# Altium PCB Charging.PcbDoc
Units mm, origin at the board's own origin, x right, y up, seen from the top; angles counter-clockwise.
Board outline 92.58 x 84.07 mm, 2 copper layers (Top Layer, Bottom Layer); 22 components, 22 nets, 84 pads, 0 vias.
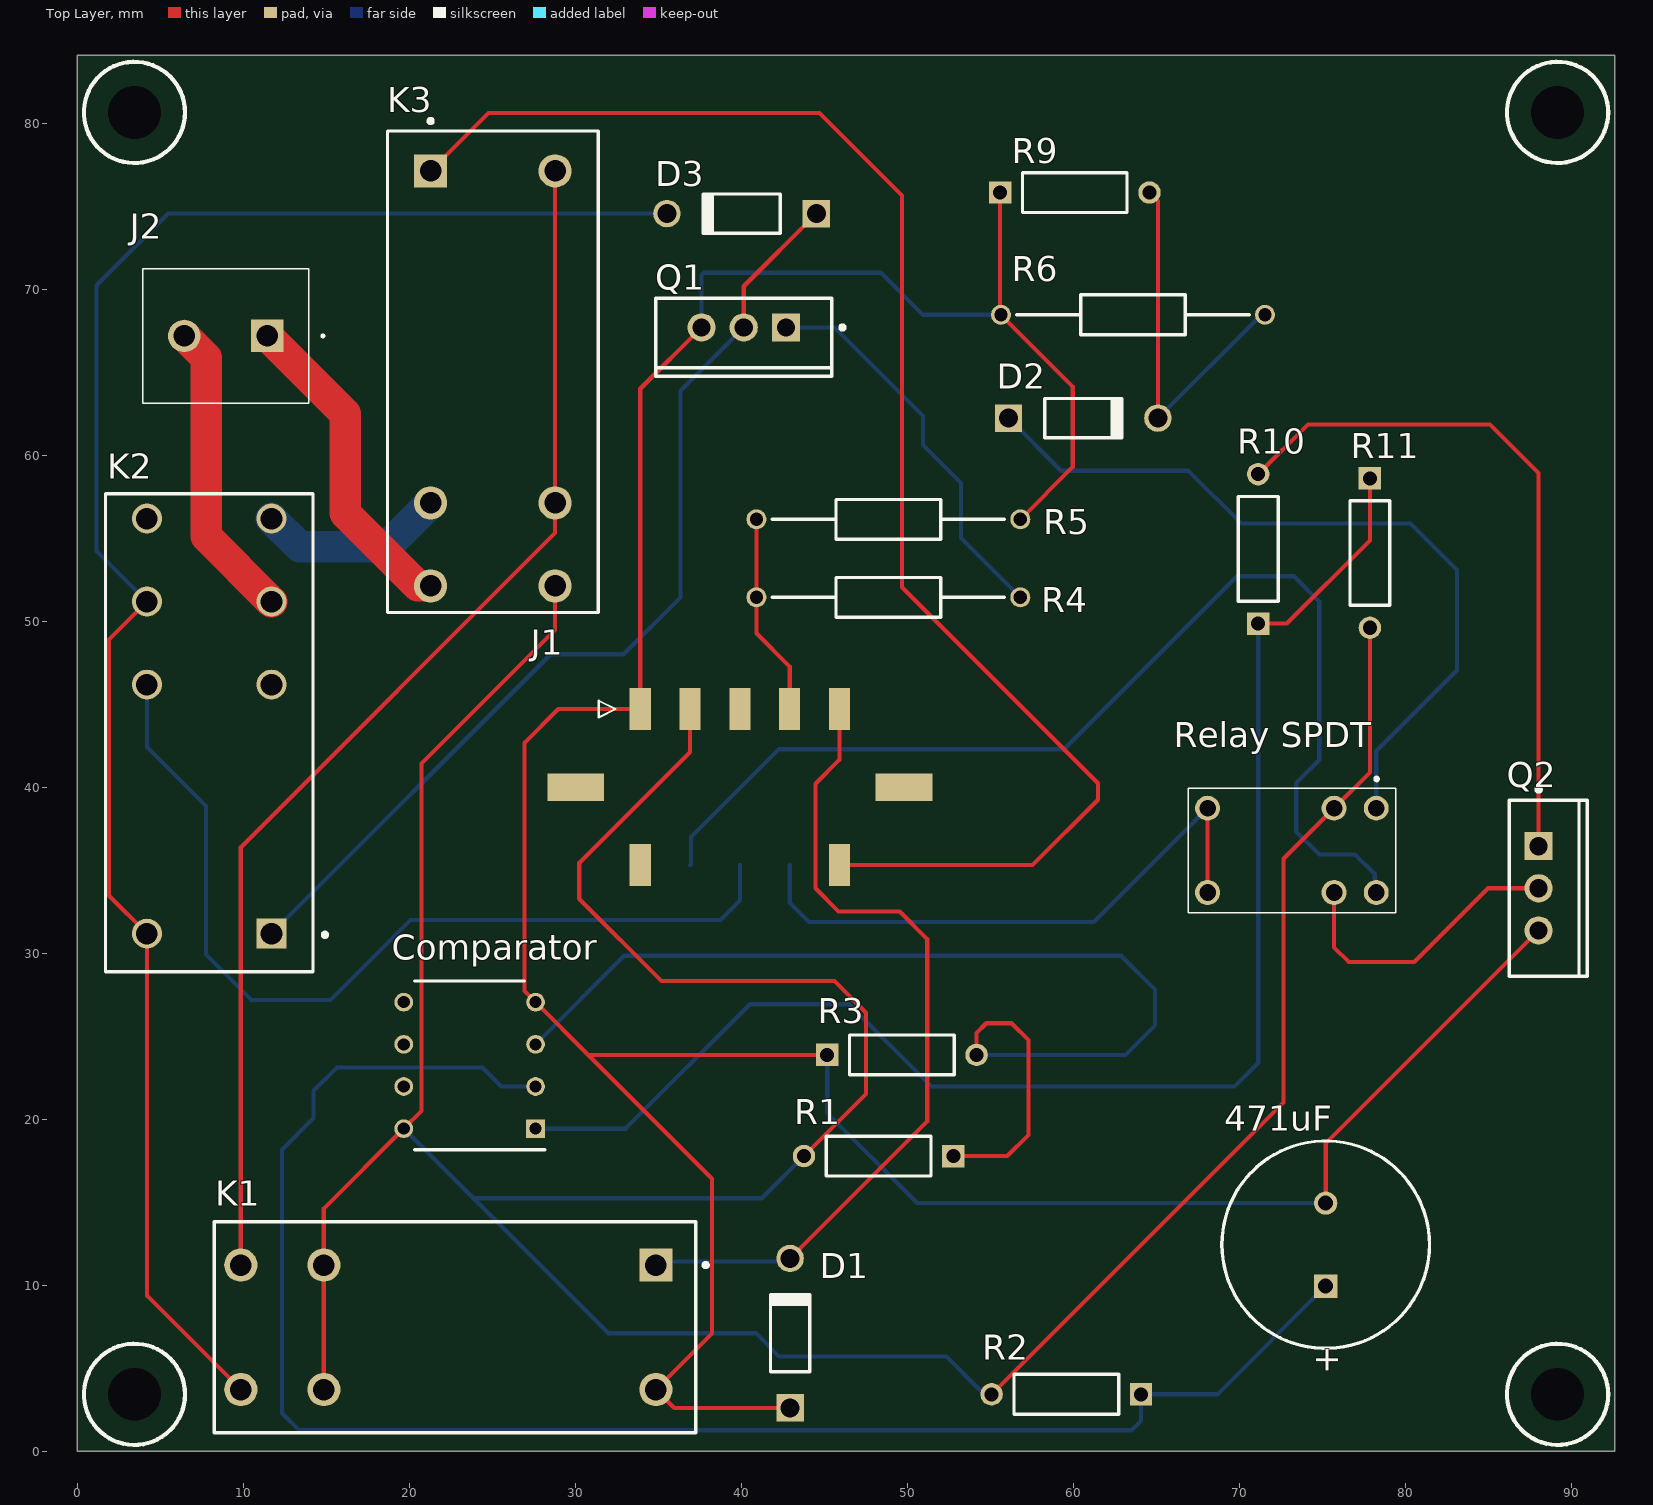
[diagram p0: Top Layer view]
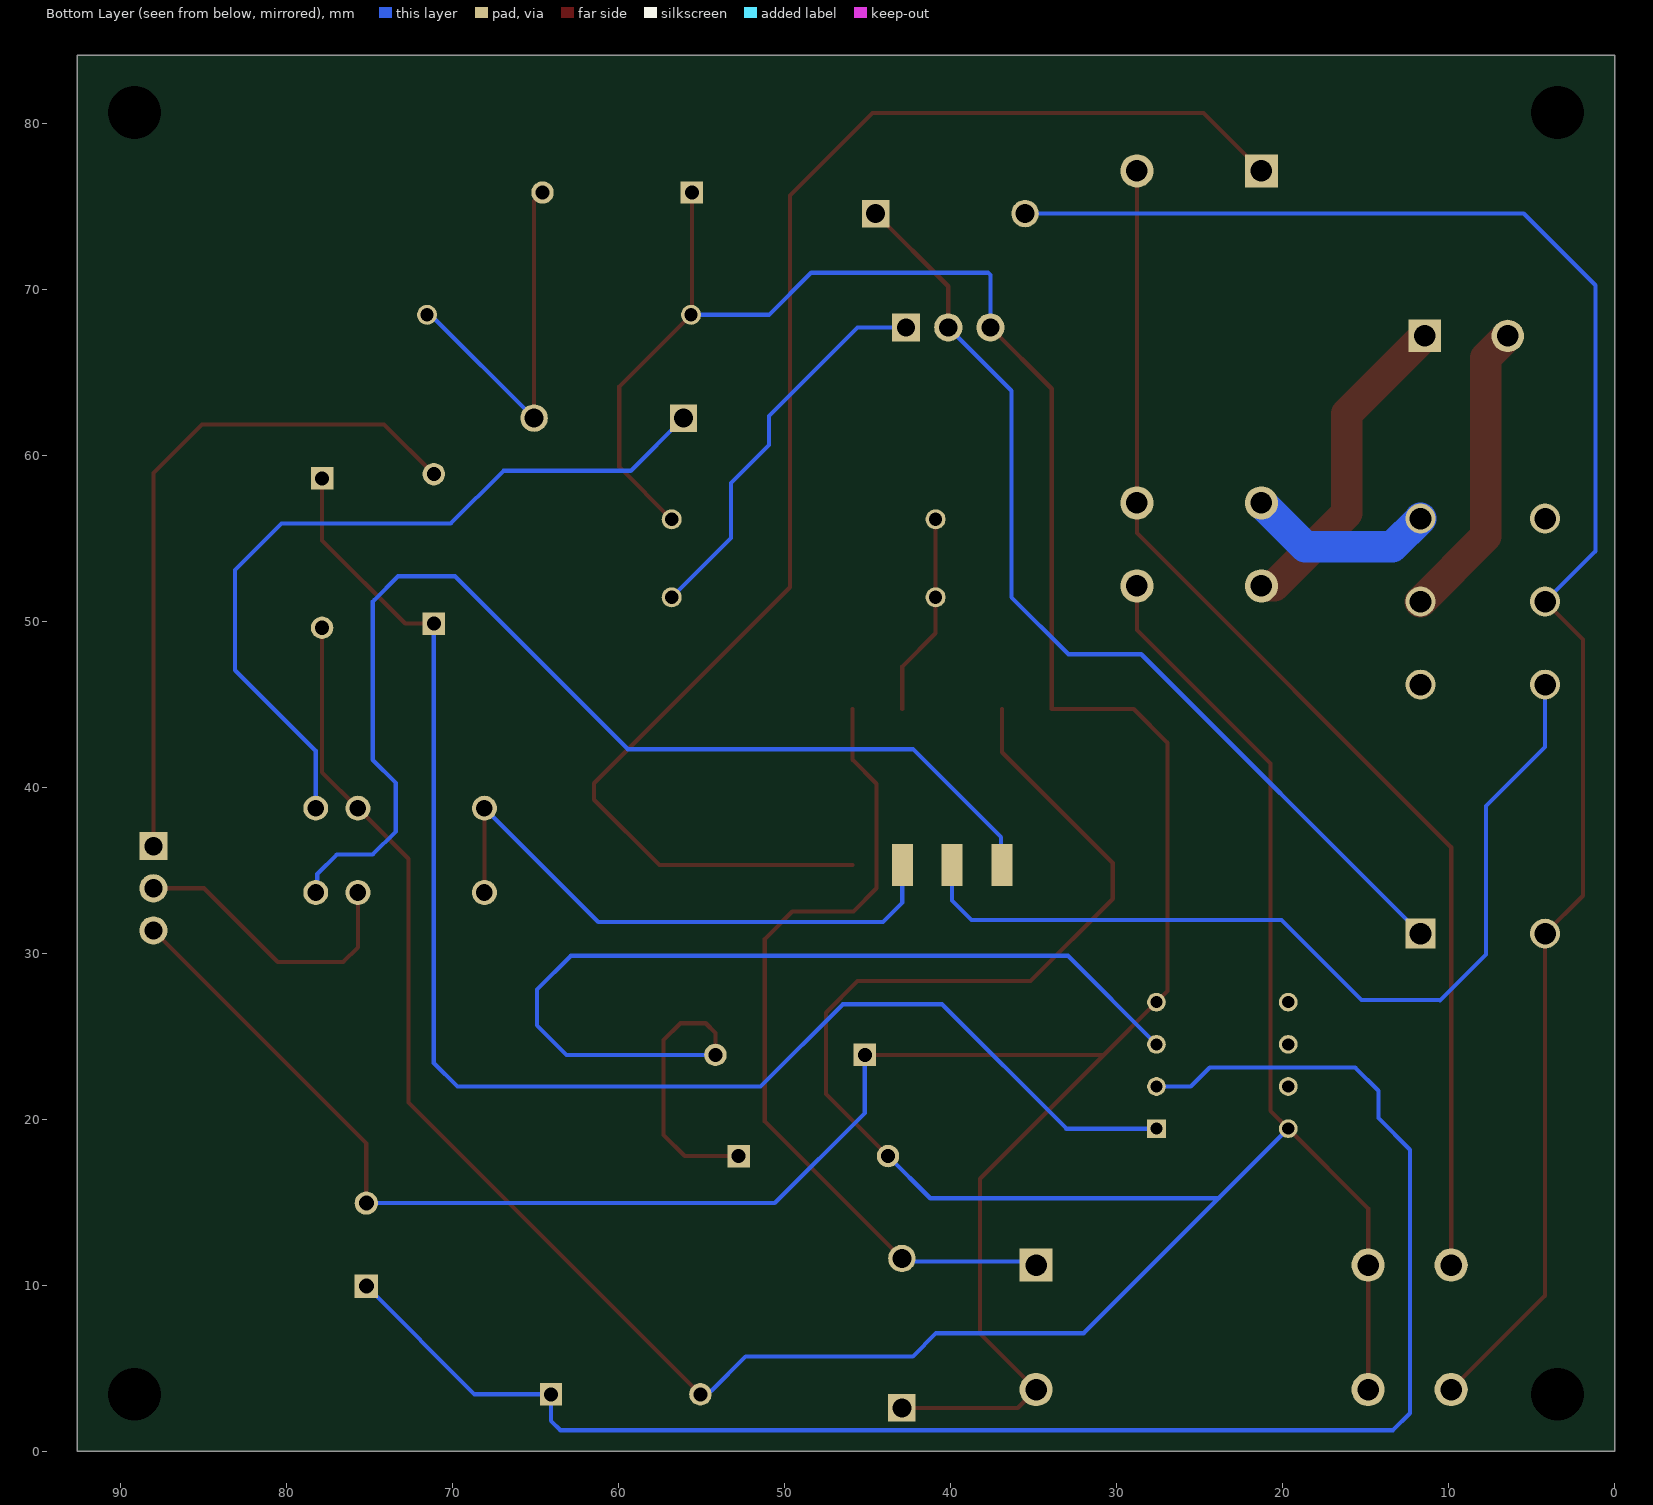
[diagram p1: Bottom Layer view, seen from below]

## Layer stack, top to bottom
Top Solder: solder mask 0.0102, Solder Resist, Dk 3.5
Top Layer: signal copper 0.0356
Dielectric 1: dielectric 0.32, FR-4, Dk 4.8
Bottom Layer: signal copper 0.0356
Bottom Solder: solder mask 0.0102, Solder Resist, Dk 3.5

## Board outline
0,0 0,84.074 92.583,84.074 92.583,0

## Design rules (kind name [scope] priority, off if disabled: settings)
Clearance [All] p1: gap=0.254 ignorepadtopadclearanceinfootprint=FALSE
PolygonConnect [All] p1: connectstyle=Relief reliefconductorwidth=0.254 reliefentries=4 polygonreliefangle="90 Angle" airgapwidth=0.254
RoutingVias [All] p1: holewidth=0.711 width=1.27 viastyle="Through Hole" minholewidth=0.711 minwidth=1.27 maxholewidth=0.711 maxwidth=1.27
SolderMaskExpansion [All] p1: expansion=0.102 istentingtop=FALSE
SupplyNets "Schematic Supply Nets_12" [InNet('COIL_2')] p1: voltage=0.000
SupplyNets "Schematic Supply Nets_11" [InNet('CP (Control Pilot)')] p2: voltage=0.000
SupplyNets "Schematic Supply Nets_10" [InNet('1IN-')] p3: voltage=0.000
SupplyNets "Schematic Supply Nets_9" [InNet('SDC-')] p4: voltage=0.000
SupplyNets "Schematic Supply Nets_8" [InNet('BMS Fault')] p5: voltage=0.000
SupplyNets "Schematic Supply Nets_7" [InNet('PE (GND)')] p6: voltage=0.000
SupplyNets "Schematic Supply Nets_6" [InNet('Switch Out')] p7: voltage=0.000
SupplyNets "Schematic Supply Nets_5" [InNet('Jumpstart')] p8: voltage=0.000
SupplyNets "Schematic Supply Nets_4" [InNet('BMS CP Control')] p9: voltage=0.000
SupplyNets "Schematic Supply Nets_3" [InNet('IMD LED')] p10: voltage=0.000
SupplyNets "Schematic Supply Nets_2" [InNet('12V')] p11: voltage=0.000
SupplyNets "Schematic Supply Nets_1" [InNet('IMD Fault')] p12: voltage=0.000
SupplyNets "Schematic Supply Nets" [InNet('SDC+')] p13: voltage=0.000
Width [All] p1: maxlimit=0.254 minlimit=0.254 preferedwidth=0.254
30 further rules are at their usual default settings.

## Components (designator, comment, footprint, x,y, rotation, side; value= is the part's Value field where it differs from the comment)
471uF "ECA-1JHG471" CAPPR65-500-2000X1250X2200 75.184,12.446 r90 top
Comparator "LM2903P" DIP794W53P254L959H508Q8N 23.622,23.241 r180 top
D1 "1N4001-T" DIOD-DO-41-P-2_V 42.926,7.112 r90 top
D2 "1N4001-T" DIOD-DO-41-P-2_V 60.579,62.23 r0 top
D3 "1N4001-T" DIOD-DO-41-P-2_V 40.005,74.549 r180 top
J1 "43045-1019" 43045-10YY_181920 39.899,40.005 r180 top
J2 "1729018" 1729018 11.43,67.183 r180 top
K1 "G2RL-2A4-DC12" FP-G2RL-2A4-DC12-MFG 22.74,7.465 r180 top
K2 "G2RL-24-DC24" OMRON-G2RL-24_V 7.934,43.681 r90 top
K3 "G2RL-2A4-DC12" FP-G2RL-2A4-DC12-MFG 25.019,65.024 r270 top
Q1 "IRF540" VISH-TO-220AB-3_A 40.132,67.691 r270 top
Q2 "IRF540" VISH-TO-220AB-3_A 88.011,33.909 r0 top
R1 "MFR-25FBF52-1K" RESA60-630X240 48.26,17.78 r180 top
R2 "MFR-25FBF52-1K" RESA60-630X240 59.563,3.429 r180 top
R3 "MFR-25FBF52-1K" RESA60-630X240 49.657,23.876 r0 top
R4 "MFR-25FBF52-2K" RESAD1590W60L630D240 40.894,51.435 r0 top
R5 "MFR-25FBF52-2K" RESAD1590W60L630D240 40.894,56.134 r0 top
R6 "2.7k" RESAD1590W60L630D240 55.626,68.453 r0 top
R9 "MFR-25FBF52-1K" RESA60-630X240 60.071,75.819 r0 top
R10 "4.75 k" RESA60-630X240 71.12,54.356 r90 top
R11 "4.75 k" RESA60-630X240 77.851,54.102 r270 top
"Relay SPDT" "G5V-1-DC12" G5V1DC12 73.152,36.52 r180 top

## Footprints (in the part's own frame and the unit in brackets; to place one, negate y for a bottom-side part, rotate by r counter-clockwise, add the part's x,y. Pads: shape width x height; smd on the part's side, far side on the other; paste and mask are expansions set on the pad)
43045-10YY_181920 [mm]
  rect 1.27x2.54 smd: 1(6,-4.7) 2(3,-4.7) 3(0,-4.7) 4(-3,-4.7) 5(-6,-4.7) 6(6,4.7) 10(-6,4.7)
  rect 1.27x2.54 smd far side: 7(3,4.7) 8(0,4.7) 9(-3,4.7)
  rect 3.43x1.65 smd: 11(9.885,0) 12(-9.885,0)
  silkscreen extent 7.5,-5.2 8.5,-4.2, body extent -11.32,-5.6 11.32,5.6, height 9.96
1729018 [mm]
  rect 1.95x1.95 hole 1.3: 1(0,0)
  round 1.95 hole 1.3: 2(5,0)
  silkscreen extent -3.4,-4.05 7.5,4.05, body extent -2.93,-4.05 7.47,4.05, height 10.82
CAPPR65-500-2000X1250X2200 [mm] "THD, 2-Leads, Dia 12.5mm, Body Length 20mm"
  rect 1.4x1.4 hole 0.9: 1(-2.5,0)
  round 1.4 hole 0.9: 2(2.5,0)
  silkscreen extent -6.25,-6.25 6.25,6.25, body extent -6.25,-6.25 6.26,6.25, height 22.01
DIOD-DO-41-P-2_V [mm] "2-Leads, Axial Lead, Body 4.635x2.36mm, Pin Spacing 9mm"
  rect 1.65x1.65 hole 1.15: 1(-4.5,0)
  round 1.65 hole 1.15: 2(4.5,0)
  silkscreen extent -2.32,-1.18 2.32,1.18, body extent -4.93,-1.18 4.93,1.18, height 2.35
DIP794W53P254L959H508Q8N [mm]
  rect 1.13x1.13 hole 0.73: 1(-3.97,3.81)
  round 1.13 hole 0.73: 2(-3.97,1.27) 3(-3.97,-1.27) 4(-3.97,-3.81) 5(3.97,-3.81) 6(3.97,-1.27) 7(3.97,1.27) 8(3.97,3.81)
  silkscreen extent -4.54,-5.08 3.3,5.08, body extent -4.1,-4.64 4.1,4.64, height 4.21
FP-G2RL-2A4-DC12-MFG [mm]
  rect 2x2 hole 1.3 paste-2539.97 mask+0: 1(-12.1,-3.75)
  round 2 hole 1.3 paste-2539.97 mask+0: 3(7.9,-3.75) 4(12.9,-3.75) 5(12.9,3.75) 6(7.9,3.75) 8(-12.1,3.75)
  silkscreen extent -15.23,-6.35 14.5,6.35, body extent -14.6,-6.45 14.6,6.45, height 0.25
G5V1DC12 [mm]
  round 1.5 hole 1: 1(-5.08,-2.215) 2(-2.54,-2.215) 5(5.08,-2.215) 6(5.08,2.865) 9(-2.54,2.865) 10(-5.08,2.865)
  silkscreen extent -6.25,-4.07 6.25,4.08, body extent -6.15,-3.3 6.15,3.98, height 9.8
OMRON-G2RL-24_V [mm] "THD, 8-Leads, Body 28.8x12.5mm"
  rect 1.8x1.8 hole 1.3: 1(-12.5,-3.75)
  round 1.8 hole 1.3: 2(2.5,-3.75) 3(7.5,-3.75) 4(12.5,-3.75) 5(12.5,3.75) 6(7.5,3.75) 7(2.5,3.75) 8(-12.5,3.75)
  silkscreen extent -14.8,-7.1 14,6.25, body extent -14.8,-6.25 14,6.25, height 15.7
RESA60-630X240 [mm] "Axial Resistor, 2-Leads, Dia 2.4mm, Body Length 6.3mm"
  rect 1.35x1.35 hole 0.85: 1(-4.5,0)
  round 1.35 hole 0.85: 2(4.5,0)
  silkscreen extent -3.15,-1.2 3.15,1.2, body extent -3.15,-1.2 3.15,1.2, height 2.4
RESAD1590W60L630D240 [mm]
  round 1.2 hole 0.8: 1(0,0) 2(15.9,0)
  silkscreen extent 0.95,-1.2 14.95,1.2, body extent -0.3,-1.29 16.2,1.29, height 2.6
VISH-TO-220AB-3_A [mm] "FM, 3-Leads, Body 10.55x4.65mm, Pitch 2.54mm"
  rect 1.7x1.7 hole 1.1: 1(0,2.54)
  round 1.7 hole 1.1: 2(0,0) 3(0,-2.54)
  silkscreen extent -1.76,-5.3 2.94,6.08, body extent -1.74,-5.28 2.91,5.28, height 19.31

## Part data
471uF: library part CMP-1665-00014-4, "Aluminum Electrolytic Capacitor (Radial Lead Type), 470 uF, 63 V, -55 to 105 degC, 2-Pin THD, RoHS, Bulk", Manufacturer=Panasonic, Max Operating Temperature="105 degC", Min Operating Temperature="-55 degC", Package Quantity=200, Voltage Rating="63 V", ComponentLink1Description="Manufacturer URL", ComponentLink1URL=http://www.panasonic.com/, ComponentLink2Description=Datasheet, ComponentLink2URL=http://industrial.panasonic.com/cdbs/www-data/pdf/RDF0000/ABA0000C1038.pdf, DatasheetVersion=03/2016, Height="20 mm", Lead Pitch="5 mm", Length="20 mm", Mount="Through Hole", Mounting Technology="Through Hole", PackageDescription="2-Pin Through Hole Device, Dia 12.5 mm, Body Length 20 mm", PackageReference=Radial, Packaging=Bulk, Pins=2, REACH SVHC="No SVHC", RoHSCompliant=true
Comparator: "Integrated Circuit", Manufacturer_Name="Texas Instruments", Mouser Part Number=595-LM2903P, Arrow Part Number=LM2903P, Arrow Price/Stock=https://www.arrow.com/en/products/lm2903p/texas-instruments?utm_currency=USD&region=nac, Datasheet Link=http://www.ti.com/lit/ds/symlink/lm2903.pdf, Height=5.08mm, Manufacturer_Part_Number=LM2903P, Mouser Price/Stock=https://www.mouser.co.uk/ProductDetail/Texas-Instruments/LM2903P?qs=3pnr37ZAbK83YuwoFcyYVA%3D%3D
D1 D2 D3: library part CMP-0639-00006-2, "1.0 A Rectifier, 15 pF, 50 V, -65 to 150 degC, 2-Pin DO-41 Plastic, RoHS, Tape and Reel", Manufacturer="Diodes Inc", Max. Average Rectified Current IO (A)=1, Operating Temperature Range (degC)="-65 to 150", ComponentLink1Description="Manufacturer URL", ComponentLink1URL=http://diodes.com/, ComponentLink2Description=Datasheet, ComponentLink2URL=http://diodes.com/datasheets/ds28002.pdf, CT (pF)=15, DatasheetVersion="Rev. 8-2", Max. IFSM (A)=30, Max. IR (uA)=5, Mounting Technology="Through Hole", PackageDescription="2-Pin Axial Lead, Body 4.635 x 2.36 mm, Lead Spread 25.4 mm", PackageReference=DO-41-P-2, Packing="Tape and Reel", PartNumber=1N4001-T, RoHS=TRUE, VF (V)=1, VRRM (V)=50
J1: "Connector", Manufacturer_Name=Molex, Mouser Part Number=538-43045-1019, Arrow Part Number=43045-1019, Arrow Price/Stock=https://www.arrow.com/en/products/43045-1019/molex?region=nac, Datasheet Link=https://www.molex.com/pdm_docs/sd/430450218_sd.pdf, Height=9.91mm, Manufacturer_Part_Number=43045-1019, Mouser Price/Stock=https://www.mouser.co.uk/ProductDetail/Molex/43045-1019?qs=OWQJ9aScCGICje0BO%252BCnwQ%3D%3D
J2: "Connector", Manufacturer_Name="Phoenix Contact", Mouser Part Number=651-1729018, Arrow Part Number=1729018, Arrow Price/Stock=https://www.arrow.com/en/products/1729018/phoenix-contact?region=nac, Datasheet Link=http://www.phoenixcontact.com/de/produkte/1729018/pdf, Height=10.15mm, Manufacturer_Part_Number=1729018, Mouser Price/Stock=https://www.mouser.co.uk/ProductDetail/Phoenix-Contact/1729018?qs=cq3Rj917t3kvawwx9wVa9g%3D%3D
K1 K3: library part CMP-08822-000182-1, "RELAY GEN PURPOSE DPST 8A 12V", Case/Package=DIP, Coil Current=33.3mA, Coil Power=400mW, Coil Resistance=360R, Coil Voltage (DC)=12V, Contact Current Rating=8A, Max Operating Temperature=85°C, Max Voltage Rating (AC)=440V, Max Voltage Rating (DC)=300V, Min Operating Temperature=-40°C, Package Quantity=20, Coil Type=Non-Latching, Contact Material=Silver, Height=15.7mm, Length=29mm, Max Current Rating=8A, Mount="Through Hole", Number of Pins=6, Operate Time=15ms, Packaging=Bulk, Power Consumption=400mW, Radiation Hardening=No, Relay Type="General Purpose", Release Time=5ms, Series=G2RL, Termination="PC Pin", Throw Configuration=DPST, Weight=12g, Width=12.7mm
K2: library part CMP-2000-06305-1, "Low Profile Power Relay with 15.7 mm Height, Ideal for Incorporation in Miniature Equipment, 24 V, -40 to 85 degC, 8-Pin THD, RoHS, Bulk", Coil Current=16.7mA, Coil Resistance=1.44kOhms, Coil Voltage=24V, Manufacturer=Omron, Package Description="8-Pin Through Hole Device, Body 28.8 x 12.5 mm", Package Reference=G2RL-24, Power Consumption=400mW, Brand=OmronElectronics, Coil Type=Non-Latching, Contact Form=DPDT(2FormC), Contact Material=SilverNickel, Contact Termination=Pin, Datasheet URL=http://www.omron.com/ecb/products/pdf/en-g2rl.pdf, Datasheet Version=03/2016, Factory Pack Quantity=20, Height=15.7mm, Length=29mm, Manufacturer URL=http://www.omron.com/, Mounting Style=ThroughHole, Mounting Technology=ThroughHole, Product=PowerRelays, Product Category=GeneralPurposeRelays, RoHS=Details, Series=G2RL-2, Type=HighCurrent, Width=12.7mm
Q1 Q2: library part CMP-2000-06461-1, "Power MOSFET, 100 VDS, -55 to 175 degC, 3-Pin TO-220AB, RoHS, Tube", Id - Continuous Drain Current=28A, Manufacturer=Vishay, Maximum Operating Temperature=+175C, Minimum Operating Temperature=-55C, Package / Case=TO-220-3, Package Description="3-Pin Flange Mount, Body 10.275 x 4.45 mm, Pitch 2.54 mm", Package Reference=TO-220AB-3, Pd - Power Dissipation=150W, Rds On - Drain-Source Resistance=77mOhms, Vds - Drain-Source Breakdown Voltage=100V, Vgs - Gate-Source Voltage=20V, &lt;PCN&gt;=http://www.mouser.com/PCN/Vishay_SIL_0182015.pdf, Brand=VishaySemiconductors, Channel Mode=Enhancement, Configuration=Single, Datasheet URL=http://www.vishay.com/docs/91021/91021.pdf, Datasheet Version="Rev. B, 03/2011", Factory Pack Quantity=50, Fall Time=43ns, Height=9.01mm, Length=10.51mm, Manufacturer URL=http://www.vishay.com/, Mounting Style=ThroughHole, Mounting Technology=ThroughHole, Number of Channels=1Channel, Package URL=http://www.vishay.com/docs/71195/to220ab.pdf, Packaging=Tube, Product Category=MOSFET, Rise Time=44ns, RoHS=NoRoHSVersionAvailable, Technology=Si, Transistor Polarity=N-Channel, Transistor Type=1N-Channel, Typical Turn-Off Delay Time=53ns, Typical Turn-On Delay Time=11ns, Unit Weight=0.211644oz, Width=4.7mm
R1 R2 R3 R9: library part CMP-1659-00075-1, "Axial Resistor, 1 KOhm, +/- 1%, 250 mW, -55 to 155 degC, 2-Pin THD, RoHS, Bulk", Case\Package=Axial, Max Operating Temperature="155 degC", Min Operating Temperature="-55 degC", Package Quantity=200, Power Rating="250 mW", Resistance="10 k", Tolerance=1%, Voltage Rating="250 V", ComponentLink1Description="Manufacturer URL", ComponentLink1URL=http://www.yageo.com/, ComponentLink2Description=Datasheet, ComponentLink2URL=http://www.yageo.com/documents/recent/Yageo%20LR_MFR_2013.pdf, DatasheetVersion=Apr-13, Length="0.248 inch", PackageDescription="2-Pin Axial Lead, Dia 2.4 mm, Body Length 6.3 mm", PackageReference=MFR-25, Packaging=Bulk, RoHSCompliant=true
R4 R5: "Resistor", Manufacturer_Name=YAGEO, Resistance=2k, Datasheet Link=https://www.yageo.com/upload/media/product/app/datasheet/lr/yageo-mfr_datasheet.pdf, Manufacturer_Part_Number=MFR-25FBF52-2K
R6: library part CFR-25JB-52-2K7, "Resistor", Manufacturer_Name=KEMET, Mouser Part Number=603-CFR-25JB-52-2K7, Resistance=2k7, Datasheet Link=https://www.yageo.com/upload/media/product/productsearch/datasheet/lr/YAGEO%20CFR_datasheet_2021v0.pdf, Manufacturer_Part_Number=CFR-25JB-52-2K7, Mouser Price/Stock=https://www.mouser.com/Search/Refine.aspx?Keyword=603-CFR-25JB-52-2K7
R10 R11: library part CMP-1659-00066-1, "Axial Resistor, 4.75 KOhm, +/- 1%, 0.25 W, -55 to 155 degC, 2-Pin THD, RoHS, Bulk", Capacitance="22 uF", Case Code (Imperial)=1210, Case Code (Metric)=3225, Max Operating Temperature="125 degC", Min Operating Temperature="-55 degC", Package Quantity=1000, Resistance=4k75, Tolerance=10%, Type (Capacitors)=X7R, Voltage Rating="25 V", Case\Package=1210, ComponentLink1Description="Manufacturer URL", ComponentLink1URL=http://www.yageo.com/, ComponentLink2Description=Datasheet, ComponentLink2URL=http://www.yageo.com/documents/recent/Yageo%20LR_MFR_2013.pdf, DatasheetVersion=Apr-13, Height="2.5 mm", Length="3.2 mm", Mount="Surface Mount", PackageDescription="2-Pin Axial Lead, Dia 2.4 mm, Body Length 6.3 mm", PackageReference=MFR-25, Packaging="Tape and Reel", Pins=2, Radiation Hardening=No, REACH SVHC="No SVHC", RoHSCompliant=true, Voltage Rating (DC)="25 V", Width="2.5 mm"
"Relay SPDT": "Relay or Contactor", Manufacturer_Name="Omron Electronics", Mouser Part Number=653-G5V-1-DC12, Arrow Part Number=G5V-1-DC12, Arrow Price/Stock=https://www.arrow.com/en/products/g5v-1-dc12/omron?region=nac, Datasheet Link=https://componentsearchengine.com/Datasheets/1/G5V-1-DC12.pdf, Height=10mm, Manufacturer_Part_Number=G5V-1-DC12, Mouser Price/Stock=https://www.mouser.co.uk/ProductDetail/Omron-Electronics/G5V-1-DC12?qs=nNiD76Ca0%252BuMuQOpoevaxA%3D%3D

## Free pads (board coordinates)
  round 1.524 hole 3.175 unplated: 1(89.154,80.645) 2(3.429,80.645) 3(3.429,3.429) 4(89.154,3.429)

## Nets (pads, with @x,y where several pads share a name; then routed paths per layer and width w, separated by ;. In a path a pad name is that pad's centre, name@x,y a point inside that pad or via, vN(x,y) a via of type N, cw(c..) or ccw(c..) an arc to the next point about the centre after c; other vN are vias at no path point)
1IN-: Comparator.3 R1.1 R3.2 | length 69.9
  Top Layer w0.254: R1.1 56.007,17.78 57.277,19.05 57.277,24.765 56.261,25.781 54.737,25.781 54.157,25.201 R3.2
  Bottom Layer w0.254: Comparator.3 32.926,29.845 62.865,29.845 64.897,27.813 64.897,25.654 63.119,23.876 R3.2
12V: "Relay SPDT.2" Comparator.8 J1.2 K1.3 K1.6 K3.5 R1.2 R2.2 R11.2 | length 217.3
  Top Layer w0.254: K1.6 K1.3 14.84,14.619 Comparator.8 20.726,20.505 20.726,41.427 28.769,49.47 K3.5 ; J1.2 36.899,42.106 30.226,35.433 30.226,33.274 35.179,28.321 45.593,28.321 47.498,26.416 47.498,21.518 R1.2 ; R2.2 72.644,21.01 72.644,35.687 75.692,38.735 77.851,40.894 R11.2
  Bottom Layer w0.254: Comparator.8 23.843,15.24 ; 31.988,7.096 31.971,7.112 ; R1.2 41.22,15.24 23.843,15.24 ; R2.2 54.853,3.639 54.41,3.639 52.334,5.715 42.266,5.715 40.869,7.112 31.971,7.112 ; 23.843,15.24 31.971,7.112
"BMS CP Control": "Relay SPDT.10" J1.7 | length 68.1
  Bottom Layer w0.254: J1.7 36.957,35.363 36.957,36.99 42.258,42.291 59.436,42.291 69.85,52.705 73.279,52.705 74.729,51.255 74.803,51.181 74.803,41.656 73.406,40.259 73.406,37.338 74.803,35.941 76.962,35.941 78.139,34.764 78.139,33.748 78.232,33.655
"BMS Fault": J1.10 K3.1 | length 90.4
  Top Layer w0.254: K3.1 24.749,80.604 44.696,80.604 49.657,75.643 49.657,52.045 61.468,40.234 61.468,39.243 57.53,35.305 J1.10
COIL_2: "Relay SPDT.9" Q2.2 | length 17.8
  Top Layer w0.254: 75.692,33.655 75.692,30.353 76.581,29.464 80.518,29.464 84.963,33.909 Q2.2
"CP (Control Pilot)": "Relay SPDT.5" "Relay SPDT.6" J1.9 | length 35.8
  Top Layer w0.254: 68.072,33.655 68.072,38.735
  Bottom Layer w0.254: 42.899,33.047 J1.9 ; 42.926,33.02 44.069,31.877 61.214,31.877 68.072,38.735
"IMD Fault": J1.4 R4.1 R5.1 | length 12.3
  Top Layer w0.254: R5.1 R4.1 40.894,49.276 42.899,47.271 J1.4
"IMD LED": J1.8 K2.7 | length 55.6
  Bottom Layer w0.254: 4.18,42.429 7.747,38.862 7.747,29.928 10.519,27.156 10.541,27.178 15.24,27.178 20.066,32.004 38.735,32.004 39.899,33.168 J1.8 ; K2.7 4.191,46.174 4.191,42.44
Jumpstart: "Relay SPDT.1" D2.1 | length 47.5
  Top Layer w0.254: D2.1@55.804,61.955 D2.1
  Bottom Layer w0.254: D2.1 59.254,59.055 66.929,59.055 70.104,55.88 80.295,55.88 83.089,53.086 83.089,47.046 78.232,42.189 78.232,38.735
Net471uF_1: 471uF.1 Comparator.2 R2.1 | length 102.5
  Bottom Layer w0.254: Comparator.2 25.527,21.971 24.384,23.114 15.621,23.114 14.224,21.717 14.224,20.066 12.319,18.161 12.319,2.286 13.335,1.27 63.5,1.27 64.063,1.833 R2.1 68.667,3.429 471uF.1
NetComparator_1: Comparator.1 R10.1 R11.1 | length 88.3
  Top Layer w0.254: R10.1 72.843,49.856 77.851,54.864 R11.1
  Bottom Layer w0.254: Comparator.1 33.02,19.431 40.513,26.924 46.482,26.924 51.435,21.971 69.698,21.971 71.12,23.393 R10.1
NetD2_2: D2.2 R6.2 R9.2 | length 22.8
  Top Layer w0.254: R9.2 65.079,75.311 D2.2
  Bottom Layer w0.254: D2.2 71.302,68.453 R6.2
NetD3_1: D3.1 K2.1 Q1.2 | length 59.5
  Top Layer w0.254: Q1.2 40.132,70.176 D3.1
  Bottom Layer w0.254: K2.1 28.509,48.006 32.893,48.006 36.322,51.435 36.322,63.881 Q1.2
NetD3_2: D3.2 K1.5 K2.6 K2.8 | length 108.1
  Top Layer w0.254: K2.6 1.905,48.902 1.905,33.46 K2.8 4.184,9.371 K1.5
  Bottom Layer w0.254: K2.6 1.148,54.217 1.148,64.129 1.148,70.231 5.463,74.546 5.466,74.549 D3.2
NetD4_2: K1.4 K3.6 K3.8 | length 73.7
  Top Layer w0.254: K1.4 9.84,36.383 28.769,55.312 K3.6 K3.8
NetK2_4: K2.4 K3.3 | length 11.4
  Bottom Layer w1.905: K2.4 13.382,54.483 18.628,54.483 K3.3
NetQ1_1: Q1.1 R4.2 | length 23.8
  Bottom Layer w0.254: Q1.1 45.593,67.691 50.927,62.357 50.927,60.614 53.225,58.316 53.225,55.004 R4.2
NetQ2_1: Q2.1 R10.2 | length 41.8
  Top Layer w0.254: R10.2 74.113,61.849 85.09,61.849 88.011,58.928 Q2.1
"PE (GND)": 471uF.2 Comparator.4 D1.1 J1.1 K1.8 Q1.3 Q2.3 R3.1 R5.2 R6.1 R9.1 | length 203.2
  Top Layer w0.254: Q1.3 33.899,63.998 J1.1 28.957,44.705 26.924,42.672 26.924,27.719 Comparator.4 30.767,23.876 ; 38.227,16.383 38.227,7.102 K1.8 35.943,2.612 D1.1 ; 38.227,16.416 30.767,23.876 ; R3.1 30.767,23.876 ; R9.1 55.571,68.508 59.944,64.135 59.944,59.284 R5.2 ; 471uF.2 75.184,18.542 Q2.3
  Bottom Layer w0.254: Q1.3 37.592,70.844 37.741,70.993 48.387,70.993 50.927,68.453 R6.1 ; D1.1@42.727,2.413 D1.1 ; R3.1 45.157,20.375 50.586,14.946 471uF.2
SDC+: J2.2 K2.3 | length 18.2
  Top Layer w1.905: J2.2 7.747,65.866 7.747,55.118 K2.3
SDC-: J2.1 K3.4 | length 19.6
  Top Layer w1.905: J2.1 16.129,62.484 16.129,56.515 20.502,52.142 21.251,52.142 K3.4
"Switch Out": D1.2 J1.5 K1.1 | length 50.3
  Top Layer w0.254: D1.2 51.181,19.867 51.181,30.861 49.53,32.512 45.847,32.512 44.45,33.909 44.45,40.208 45.899,41.657 J1.5
  Bottom Layer w0.254: K1.1 35.055,11.43 42.744,11.43 D1.2
pads on no net: Comparator.5 Comparator.6 Comparator.7 J1.3 J1.6 J1.11 J1.12 K2.2 K2.5

## Silkscreen, mask and mechanical layers (free items; w line width, h text height)
Top Overlay:
  circle w0.254: c3.429,3.429 r3.048
  circle w0.254: c89.154,3.429 r3.048
  circle w0.254: c89.154,80.645 r3.048
  circle w0.254: c3.429,80.645 r3.048

## Text inside footprints (layer, text, board x,y; h text height)
471uF: Top Overlay "+" at 75.934,4.646 h1.5 r90